# EAGLE board 13901-SparkFun_Differential_I2C_Breakout_PCA9615_Qwiic-panel.v10 (EAGLE 7.5.0), part 1 of 3
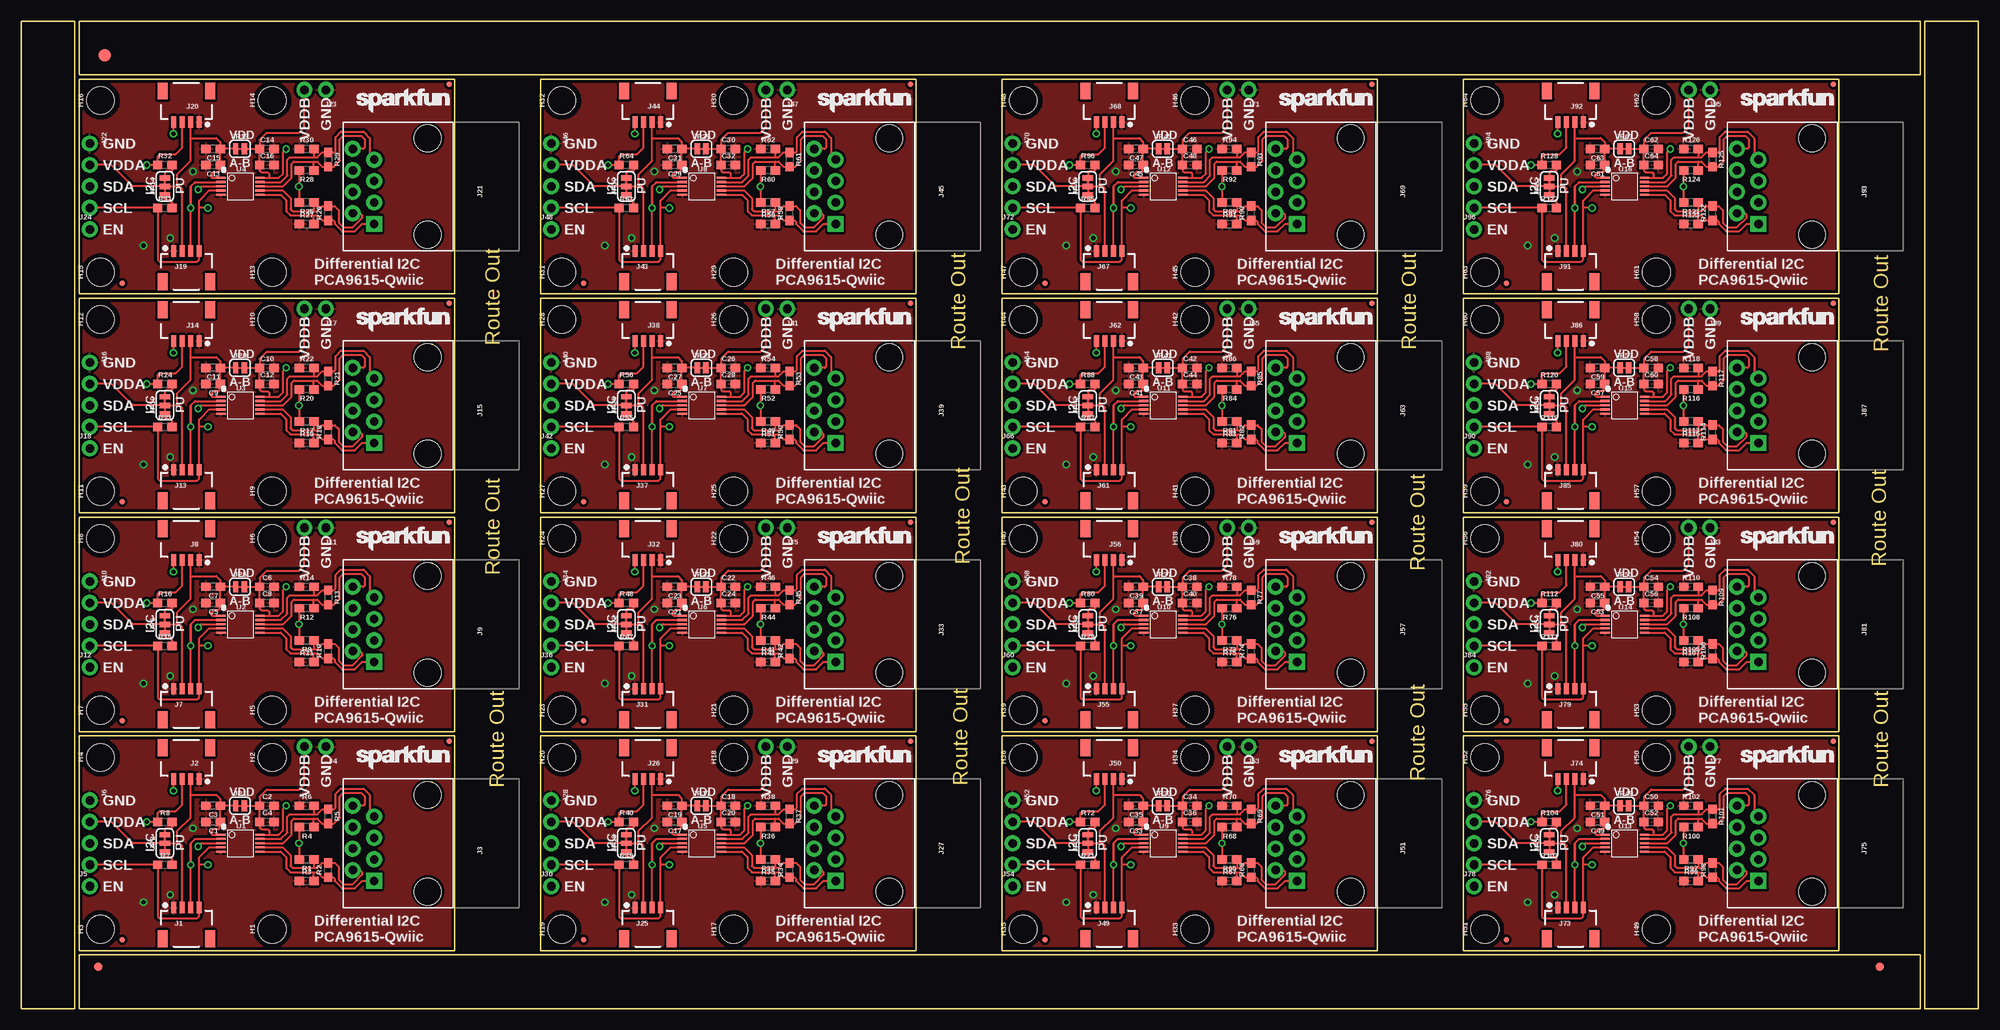
[diagram p0: board, top side]
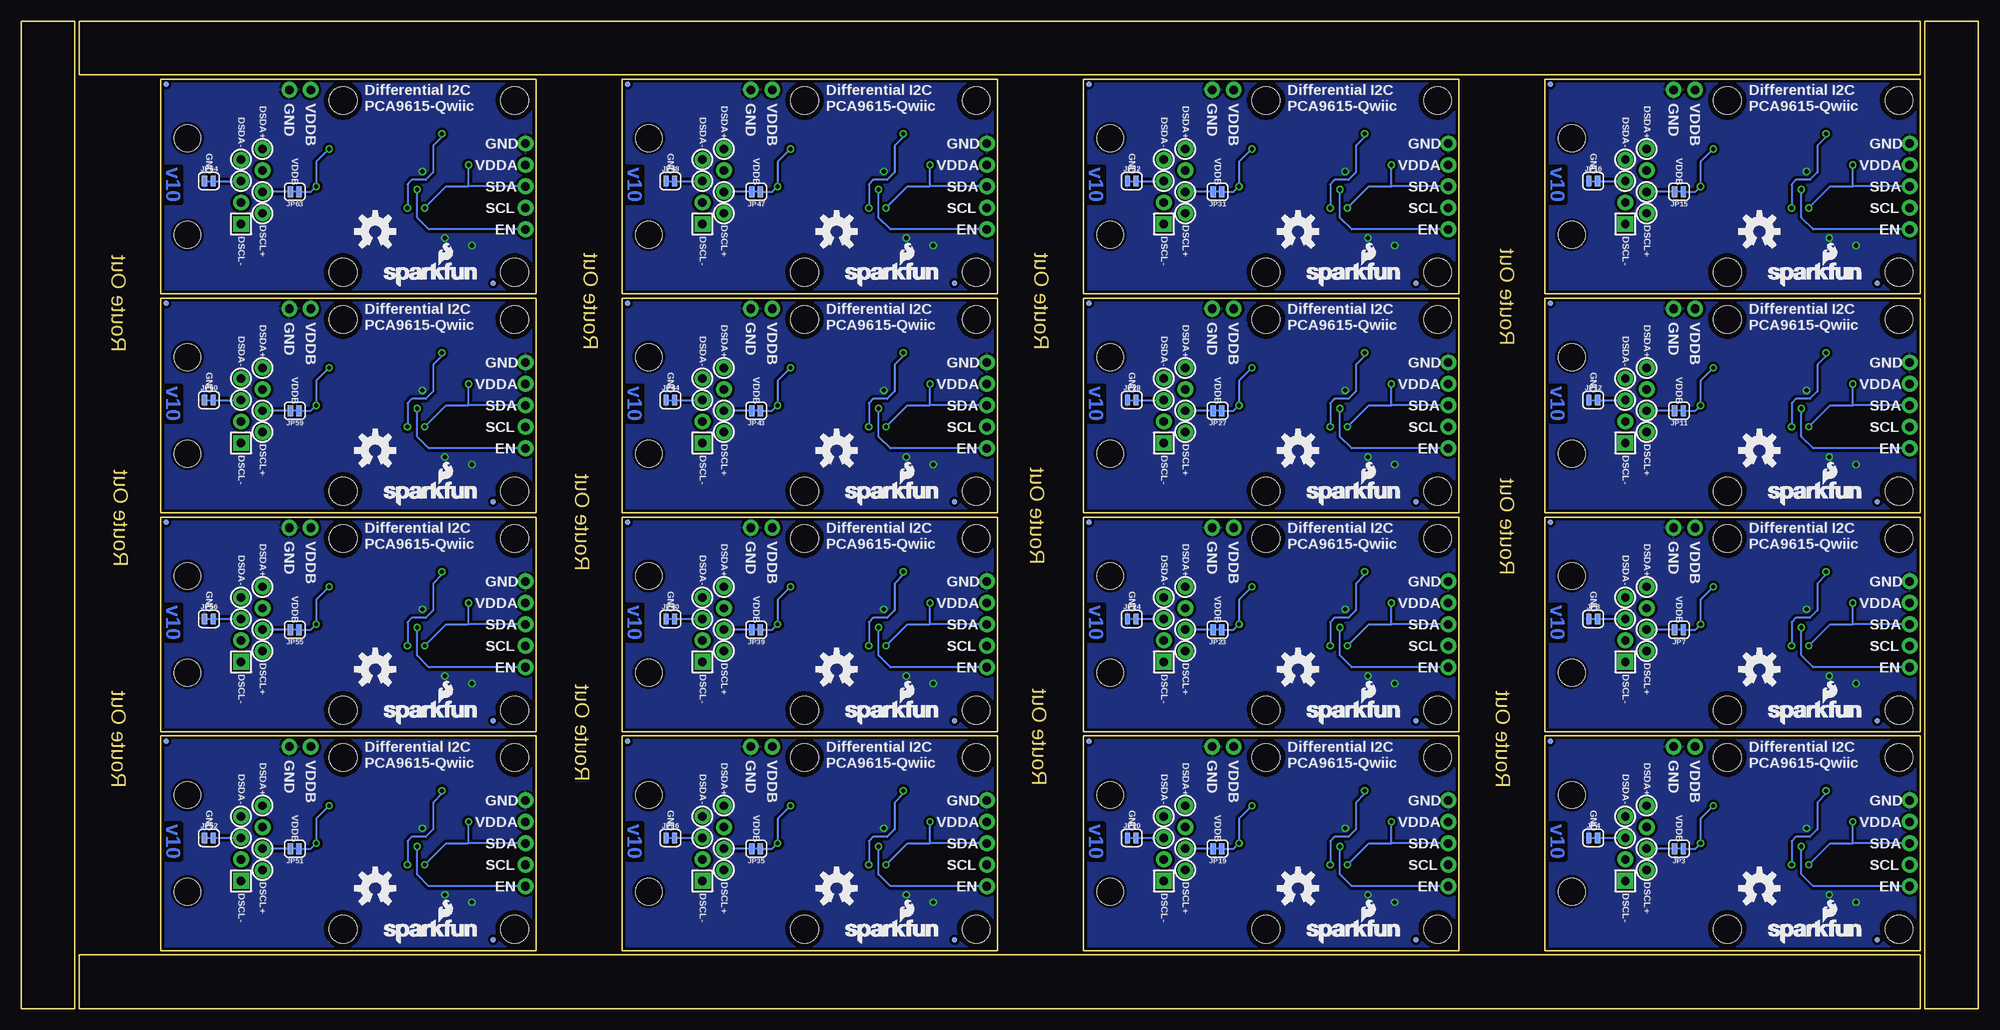
[diagram p1: board, bottom side, seen from below]

Size 231.65 x 116.84 mm. Coordinates in mm from the lower left corner, seen from the top.
Outline: 79.25,0 6.86,0 6.86,6.35 29.72,6.35
Outline: 27.18,6.35 224.79,6.35 224.79,0 76.71,0
Outline: 6.35,72.39 6.35,0 0,0 0,22.86
Outline: 0,20.32 0,116.84 6.35,116.84 6.35,69.85
Outline: 152.65,116.84 224.79,116.84 224.79,110.49 202.18,110.49
Outline: 204.72,110.49 6.86,110.49 6.86,116.84 155.19,116.84
Outline: 225.3,44.45 225.3,116.84 231.65,116.84 231.65,93.98
Outline: 231.65,96.52 231.65,0 225.3,0 225.3,46.99
Outline: 51.31,6.86 6.86,6.86 6.86,32.26 51.31,32.26 51.31,6.86
Outline: 51.31,32.77 6.86,32.77 6.86,58.17 51.31,58.17 51.31,32.77
Outline: 51.31,58.67 6.86,58.67 6.86,84.07 51.31,84.07 51.31,58.67
Outline: 51.31,84.58 6.86,84.58 6.86,109.98 51.31,109.98 51.31,84.58
Outline: 105.92,6.86 61.47,6.86 61.47,32.26 105.92,32.26 105.92,6.86
Outline: 105.92,32.77 61.47,32.77 61.47,58.17 105.92,58.17 105.92,32.77
Outline: 105.92,58.67 61.47,58.67 61.47,84.07 105.92,84.07 105.92,58.67
Outline: 105.92,84.58 61.47,84.58 61.47,109.98 105.92,109.98 105.92,84.58
Outline: 160.53,6.86 116.08,6.86 116.08,32.26 160.53,32.26 160.53,6.86
Outline: 160.53,32.77 116.08,32.77 116.08,58.17 160.53,58.17 160.53,32.77
Outline: 160.53,58.67 116.08,58.67 116.08,84.07 160.53,84.07 160.53,58.67
Outline: 160.53,84.58 116.08,84.58 116.08,109.98 160.53,109.98 160.53,84.58
Outline: 215.14,6.86 170.69,6.86 170.69,32.26 215.14,32.26 215.14,6.86
Outline: 215.14,32.77 170.69,32.77 170.69,58.17 215.14,58.17 215.14,32.77
Outline: 215.14,58.67 170.69,58.67 170.69,84.07 215.14,84.07 215.14,58.67
Outline: 215.14,84.58 170.69,84.58 170.69,109.98 215.14,109.98 215.14,84.58
Copper layers (1*16): Top 0.035mm / dielectric 1.5mm / Bottom 0.035mm
Design rules "SparkFun-2-layer-TIGHT": minimum track width 7mil, minimum drill 15mil, track to track 7mil, track to pad 7mil, pad to pad 7mil, via to via 7mil, smd to smd 7mil, copper to edge 7mil, drill to drill 7mil, minimum pad ring 7mil, minimum via ring 7mil, stop-mask expansion 4mil, vias tented up to drill 25mil, thermal gap 10mil
Net classes: 0 default: width 0.203 mm; 1 power: width 0.381 mm, clearance 0.254 mm

## Footprints (pad centres in the part's own frame; a part is rotated, then mirrored left to right if it is on the bottom)
0603 = smd 1.1 x 1: 1 -0.85,0; 2 0.85,0
FIDUCIAL-1X2 = smd 1 x 1: 1 0,0
FIDUCIAL-1.5X3 = smd 1.5 x 1.5: 1 0,0
FIDUCIAL-MICRO = smd 0.635 x 0.635: 1 0,0
STAND-OFF = hole 3.302: 0,0
1X04_1MM_RA = smd 0.6 x 1.35: 1 -1.5,0; 2 -0.5,0; 3 0.5,0; 4 1.5,0 | smd 1.2 x 2: NC1 2.8,-3.675; NC2 -2.8,-3.675
RJ45-8 = drill 1 pad 1.88 square: 1 -4.445,6.35 | drill 1 pad 1.88: 2 -3.175,8.89; 3 -1.905,6.35; 4 -0.635,8.89; 5 0.635,6.35; 6 1.905,8.89; 7 3.175,6.35; 8 4.445,8.89 | hole 3.2: -5.715,0; 5.715,0
1X02_NO_SILK = drill 1.016 pad 1.88: 1 0,0; 2 2.54,0
1X01_NO_SILK = drill 1.016 pad 1.88: 1 0,0
1X04_NO_SILK = drill 1.016 pad 1.88: 1 0,0; 2 2.54,0; 3 5.08,0; 4 7.62,0
SMT-JUMPER_2_NC_TRACE_SILK = smd 0.635 x 1.27: 1 -0.508,0; 2 0.508,0
SMT-JUMPER_3_2-NC_TRACE_SILK = smd 0.635 x 1.27: 1 -1.016,0; 2 0,0; 3 1.016,0
TSSOP10 = smd 1.1 x 0.25: 1 -2.259,1.018; 2 -2.259,0.517; 3 -2.259,0.018; 4 -2.259,-0.482; 5 -2.259,-0.988; 6 2.366,-0.988; 7 2.366,-0.482; 8 2.366,0.018; 9 2.366,0.517; 10 2.366,1.018

## Placement (x,y rotation side)
C1  0.1uF  [0603]  22.73,22.1 180 top
C2  0.1uF  [0603]  29.08,24 0 top
C3  1.0uF  [0603]  22.73,24 180 top
C4  1.0uF  [0603]  29.08,22.1 0 top
C5  0.1uF  [0603]  22.73,48.01 180 top
C6  0.1uF  [0603]  29.08,49.91 0 top
C7  1.0uF  [0603]  22.73,49.91 180 top
C8  1.0uF  [0603]  29.08,48.01 0 top
C9  0.1uF  [0603]  22.73,73.91 180 top
C10  0.1uF  [0603]  29.08,75.82 0 top
C11  1.0uF  [0603]  22.73,75.82 180 top
C12  1.0uF  [0603]  29.08,73.91 0 top
C13  0.1uF  [0603]  22.73,99.82 180 top
C14  0.1uF  [0603]  29.08,101.73 0 top
C15  1.0uF  [0603]  22.73,101.73 180 top
C16  1.0uF  [0603]  29.08,99.82 0 top
C17  0.1uF  [0603]  77.34,22.1 180 top
C18  0.1uF  [0603]  83.69,24 0 top
C19  1.0uF  [0603]  77.34,24 180 top
C20  1.0uF  [0603]  83.69,22.1 0 top
C21  0.1uF  [0603]  77.34,48.01 180 top
C22  0.1uF  [0603]  83.69,49.91 0 top
C23  1.0uF  [0603]  77.34,49.91 180 top
C24  1.0uF  [0603]  83.69,48.01 0 top
C25  0.1uF  [0603]  77.34,73.91 180 top
C26  0.1uF  [0603]  83.69,75.82 0 top
C27  1.0uF  [0603]  77.34,75.82 180 top
C28  1.0uF  [0603]  83.69,73.91 0 top
C29  0.1uF  [0603]  77.34,99.82 180 top
C30  0.1uF  [0603]  83.69,101.73 0 top
C31  1.0uF  [0603]  77.34,101.73 180 top
C32  1.0uF  [0603]  83.69,99.82 0 top
C33  0.1uF  [0603]  131.95,22.1 180 top
C34  0.1uF  [0603]  138.3,24 0 top
C35  1.0uF  [0603]  131.95,24 180 top
C36  1.0uF  [0603]  138.3,22.1 0 top
C37  0.1uF  [0603]  131.95,48.01 180 top
C38  0.1uF  [0603]  138.3,49.91 0 top
C39  1.0uF  [0603]  131.95,49.91 180 top
C40  1.0uF  [0603]  138.3,48.01 0 top
C41  0.1uF  [0603]  131.95,73.91 180 top
C42  0.1uF  [0603]  138.3,75.82 0 top
C43  1.0uF  [0603]  131.95,75.82 180 top
C44  1.0uF  [0603]  138.3,73.91 0 top
C45  0.1uF  [0603]  131.95,99.82 180 top
C46  0.1uF  [0603]  138.3,101.73 0 top
C47  1.0uF  [0603]  131.95,101.73 180 top
C48  1.0uF  [0603]  138.3,99.82 0 top
C49  0.1uF  [0603]  186.56,22.1 180 top
C50  0.1uF  [0603]  192.91,24 0 top
C51  1.0uF  [0603]  186.56,24 180 top
C52  1.0uF  [0603]  192.91,22.1 0 top
C53  0.1uF  [0603]  186.56,48.01 180 top
C54  0.1uF  [0603]  192.91,49.91 0 top
C55  1.0uF  [0603]  186.56,49.91 180 top
C56  1.0uF  [0603]  192.91,48.01 0 top
C57  0.1uF  [0603]  186.56,73.91 180 top
C58  0.1uF  [0603]  192.91,75.82 0 top
C59  1.0uF  [0603]  186.56,75.82 180 top
C60  1.0uF  [0603]  192.91,73.91 0 top
C61  0.1uF  [0603]  186.56,99.82 180 top
C62  0.1uF  [0603]  192.91,101.73 0 top
C63  1.0uF  [0603]  186.56,101.73 180 top
C64  1.0uF  [0603]  192.91,99.82 0 top
E$1  [FIDUCIAL-1X2]  9.14,4.95 270 top
E$2  [FIDUCIAL-1X2]  219.96,4.95 90 top
E$3  [FIDUCIAL-1.5X3]  9.91,112.78 0 top
FD1  FIDUCIALUFIDUCIAL  [FIDUCIAL-MICRO]  11.94,8.13 0 top
FD2  FIDUCIALUFIDUCIAL  [FIDUCIAL-MICRO]  50.67,31.62 0 top
FD3  FIDUCIALUFIDUCIAL  [FIDUCIAL-MICRO]  11.94,8.13 0 bottom
FD4  FIDUCIALUFIDUCIAL  [FIDUCIAL-MICRO]  50.67,31.62 0 bottom
FD5  FIDUCIALUFIDUCIAL  [FIDUCIAL-MICRO]  11.94,34.04 0 top
FD6  FIDUCIALUFIDUCIAL  [FIDUCIAL-MICRO]  50.67,57.53 0 top
FD7  FIDUCIALUFIDUCIAL  [FIDUCIAL-MICRO]  11.94,34.04 0 bottom
FD8  FIDUCIALUFIDUCIAL  [FIDUCIAL-MICRO]  50.67,57.53 0 bottom
FD9  FIDUCIALUFIDUCIAL  [FIDUCIAL-MICRO]  11.94,59.94 0 top
FD10  FIDUCIALUFIDUCIAL  [FIDUCIAL-MICRO]  50.67,83.44 0 top
FD11  FIDUCIALUFIDUCIAL  [FIDUCIAL-MICRO]  11.94,59.94 0 bottom
FD12  FIDUCIALUFIDUCIAL  [FIDUCIAL-MICRO]  50.67,83.44 0 bottom
FD13  FIDUCIALUFIDUCIAL  [FIDUCIAL-MICRO]  11.94,85.85 0 top
FD14  FIDUCIALUFIDUCIAL  [FIDUCIAL-MICRO]  50.67,109.35 0 top
FD15  FIDUCIALUFIDUCIAL  [FIDUCIAL-MICRO]  11.94,85.85 0 bottom
FD16  FIDUCIALUFIDUCIAL  [FIDUCIAL-MICRO]  50.67,109.35 0 bottom
FD17  FIDUCIALUFIDUCIAL  [FIDUCIAL-MICRO]  66.55,8.13 0 top
FD18  FIDUCIALUFIDUCIAL  [FIDUCIAL-MICRO]  105.28,31.62 0 top
FD19  FIDUCIALUFIDUCIAL  [FIDUCIAL-MICRO]  66.55,8.13 0 bottom
FD20  FIDUCIALUFIDUCIAL  [FIDUCIAL-MICRO]  105.28,31.62 0 bottom
FD21  FIDUCIALUFIDUCIAL  [FIDUCIAL-MICRO]  66.55,34.04 0 top
FD22  FIDUCIALUFIDUCIAL  [FIDUCIAL-MICRO]  105.28,57.53 0 top
FD23  FIDUCIALUFIDUCIAL  [FIDUCIAL-MICRO]  66.55,34.04 0 bottom
FD24  FIDUCIALUFIDUCIAL  [FIDUCIAL-MICRO]  105.28,57.53 0 bottom
FD25  FIDUCIALUFIDUCIAL  [FIDUCIAL-MICRO]  66.55,59.94 0 top
FD26  FIDUCIALUFIDUCIAL  [FIDUCIAL-MICRO]  105.28,83.44 0 top
FD27  FIDUCIALUFIDUCIAL  [FIDUCIAL-MICRO]  66.55,59.94 0 bottom
FD28  FIDUCIALUFIDUCIAL  [FIDUCIAL-MICRO]  105.28,83.44 0 bottom
FD29  FIDUCIALUFIDUCIAL  [FIDUCIAL-MICRO]  66.55,85.85 0 top
FD30  FIDUCIALUFIDUCIAL  [FIDUCIAL-MICRO]  105.28,109.35 0 top
FD31  FIDUCIALUFIDUCIAL  [FIDUCIAL-MICRO]  66.55,85.85 0 bottom
FD32  FIDUCIALUFIDUCIAL  [FIDUCIAL-MICRO]  105.28,109.35 0 bottom
FD33  FIDUCIALUFIDUCIAL  [FIDUCIAL-MICRO]  121.16,8.13 0 top
FD34  FIDUCIALUFIDUCIAL  [FIDUCIAL-MICRO]  159.89,31.62 0 top
FD35  FIDUCIALUFIDUCIAL  [FIDUCIAL-MICRO]  121.16,8.13 0 bottom
FD36  FIDUCIALUFIDUCIAL  [FIDUCIAL-MICRO]  159.89,31.62 0 bottom
FD37  FIDUCIALUFIDUCIAL  [FIDUCIAL-MICRO]  121.16,34.04 0 top
FD38  FIDUCIALUFIDUCIAL  [FIDUCIAL-MICRO]  159.89,57.53 0 top
FD39  FIDUCIALUFIDUCIAL  [FIDUCIAL-MICRO]  121.16,34.04 0 bottom
FD40  FIDUCIALUFIDUCIAL  [FIDUCIAL-MICRO]  159.89,57.53 0 bottom
FD41  FIDUCIALUFIDUCIAL  [FIDUCIAL-MICRO]  121.16,59.94 0 top
FD42  FIDUCIALUFIDUCIAL  [FIDUCIAL-MICRO]  159.89,83.44 0 top
FD43  FIDUCIALUFIDUCIAL  [FIDUCIAL-MICRO]  121.16,59.94 0 bottom
FD44  FIDUCIALUFIDUCIAL  [FIDUCIAL-MICRO]  159.89,83.44 0 bottom
FD45  FIDUCIALUFIDUCIAL  [FIDUCIAL-MICRO]  121.16,85.85 0 top
FD46  FIDUCIALUFIDUCIAL  [FIDUCIAL-MICRO]  159.89,109.35 0 top
FD47  FIDUCIALUFIDUCIAL  [FIDUCIAL-MICRO]  121.16,85.85 0 bottom
FD48  FIDUCIALUFIDUCIAL  [FIDUCIAL-MICRO]  159.89,109.35 0 bottom
FD49  FIDUCIALUFIDUCIAL  [FIDUCIAL-MICRO]  175.77,8.13 0 top
FD50  FIDUCIALUFIDUCIAL  [FIDUCIAL-MICRO]  214.5,31.62 0 top
FD51  FIDUCIALUFIDUCIAL  [FIDUCIAL-MICRO]  175.77,8.13 0 bottom
FD52  FIDUCIALUFIDUCIAL  [FIDUCIAL-MICRO]  214.5,31.62 0 bottom
FD53  FIDUCIALUFIDUCIAL  [FIDUCIAL-MICRO]  175.77,34.04 0 top
FD54  FIDUCIALUFIDUCIAL  [FIDUCIAL-MICRO]  214.5,57.53 0 top
FD55  FIDUCIALUFIDUCIAL  [FIDUCIAL-MICRO]  175.77,34.04 0 bottom
FD56  FIDUCIALUFIDUCIAL  [FIDUCIAL-MICRO]  214.5,57.53 0 bottom
FD57  FIDUCIALUFIDUCIAL  [FIDUCIAL-MICRO]  175.77,59.94 0 top
FD58  FIDUCIALUFIDUCIAL  [FIDUCIAL-MICRO]  214.5,83.44 0 top
FD59  FIDUCIALUFIDUCIAL  [FIDUCIAL-MICRO]  175.77,59.94 0 bottom
FD60  FIDUCIALUFIDUCIAL  [FIDUCIAL-MICRO]  214.5,83.44 0 bottom
FD61  FIDUCIALUFIDUCIAL  [FIDUCIAL-MICRO]  175.77,85.85 0 top
FD62  FIDUCIALUFIDUCIAL  [FIDUCIAL-MICRO]  214.5,109.35 0 top
FD63  FIDUCIALUFIDUCIAL  [FIDUCIAL-MICRO]  175.77,85.85 0 bottom
FD64  FIDUCIALUFIDUCIAL  [FIDUCIAL-MICRO]  214.5,109.35 0 bottom
H1  STAND-OFF  [STAND-OFF]  29.72,9.4 90 top
H2  STAND-OFF  [STAND-OFF]  29.72,29.72 90 top
H3  STAND-OFF  [STAND-OFF]  9.4,9.4 90 top
H4  STAND-OFF  [STAND-OFF]  9.4,29.72 90 top
H5  STAND-OFF  [STAND-OFF]  29.72,35.31 90 top
H6  STAND-OFF  [STAND-OFF]  29.72,55.63 90 top
H7  STAND-OFF  [STAND-OFF]  9.4,35.31 90 top
H8  STAND-OFF  [STAND-OFF]  9.4,55.63 90 top
H9  STAND-OFF  [STAND-OFF]  29.72,61.21 90 top
H10  STAND-OFF  [STAND-OFF]  29.72,81.53 90 top
H11  STAND-OFF  [STAND-OFF]  9.4,61.21 90 top
H12  STAND-OFF  [STAND-OFF]  9.4,81.53 90 top
H13  STAND-OFF  [STAND-OFF]  29.72,87.12 90 top
H14  STAND-OFF  [STAND-OFF]  29.72,107.44 90 top
H15  STAND-OFF  [STAND-OFF]  9.4,87.12 90 top
H16  STAND-OFF  [STAND-OFF]  9.4,107.44 90 top
H17  STAND-OFF  [STAND-OFF]  84.33,9.4 90 top
H18  STAND-OFF  [STAND-OFF]  84.33,29.72 90 top
H19  STAND-OFF  [STAND-OFF]  64.01,9.4 90 top
H20  STAND-OFF  [STAND-OFF]  64.01,29.72 90 top
H21  STAND-OFF  [STAND-OFF]  84.33,35.31 90 top
H22  STAND-OFF  [STAND-OFF]  84.33,55.63 90 top
H23  STAND-OFF  [STAND-OFF]  64.01,35.31 90 top
H24  STAND-OFF  [STAND-OFF]  64.01,55.63 90 top
H25  STAND-OFF  [STAND-OFF]  84.33,61.21 90 top
H26  STAND-OFF  [STAND-OFF]  84.33,81.53 90 top
H27  STAND-OFF  [STAND-OFF]  64.01,61.21 90 top
H28  STAND-OFF  [STAND-OFF]  64.01,81.53 90 top
H29  STAND-OFF  [STAND-OFF]  84.33,87.12 90 top
H30  STAND-OFF  [STAND-OFF]  84.33,107.44 90 top
H31  STAND-OFF  [STAND-OFF]  64.01,87.12 90 top
H32  STAND-OFF  [STAND-OFF]  64.01,107.44 90 top
H33  STAND-OFF  [STAND-OFF]  138.94,9.4 90 top
H34  STAND-OFF  [STAND-OFF]  138.94,29.72 90 top
H35  STAND-OFF  [STAND-OFF]  118.62,9.4 90 top
H36  STAND-OFF  [STAND-OFF]  118.62,29.72 90 top
H37  STAND-OFF  [STAND-OFF]  138.94,35.31 90 top
H38  STAND-OFF  [STAND-OFF]  138.94,55.63 90 top
H39  STAND-OFF  [STAND-OFF]  118.62,35.31 90 top
H40  STAND-OFF  [STAND-OFF]  118.62,55.63 90 top
H41  STAND-OFF  [STAND-OFF]  138.94,61.21 90 top
H42  STAND-OFF  [STAND-OFF]  138.94,81.53 90 top
H43  STAND-OFF  [STAND-OFF]  118.62,61.21 90 top
H44  STAND-OFF  [STAND-OFF]  118.62,81.53 90 top
H45  STAND-OFF  [STAND-OFF]  138.94,87.12 90 top
H46  STAND-OFF  [STAND-OFF]  138.94,107.44 90 top
H47  STAND-OFF  [STAND-OFF]  118.62,87.12 90 top
H48  STAND-OFF  [STAND-OFF]  118.62,107.44 90 top
H49  STAND-OFF  [STAND-OFF]  193.55,9.4 90 top
H50  STAND-OFF  [STAND-OFF]  193.55,29.72 90 top
H51  STAND-OFF  [STAND-OFF]  173.23,9.4 90 top
H52  STAND-OFF  [STAND-OFF]  173.23,29.72 90 top
H53  STAND-OFF  [STAND-OFF]  193.55,35.31 90 top
H54  STAND-OFF  [STAND-OFF]  193.55,55.63 90 top
H55  STAND-OFF  [STAND-OFF]  173.23,35.31 90 top
H56  STAND-OFF  [STAND-OFF]  173.23,55.63 90 top
H57  STAND-OFF  [STAND-OFF]  193.55,61.21 90 top
H58  STAND-OFF  [STAND-OFF]  193.55,81.53 90 top
H59  STAND-OFF  [STAND-OFF]  173.23,61.21 90 top
H60  STAND-OFF  [STAND-OFF]  173.23,81.53 90 top
H61  STAND-OFF  [STAND-OFF]  193.55,87.12 90 top
H62  STAND-OFF  [STAND-OFF]  193.55,107.44 90 top
H63  STAND-OFF  [STAND-OFF]  173.23,87.12 90 top
H64  STAND-OFF  [STAND-OFF]  173.23,107.44 90 top
J1  [1X04_1MM_RA]  19.56,11.94 0 top
J2  [1X04_1MM_RA]  19.56,27.18 180 top
J3  RJ45  [RJ45-8]  48.13,19.56 90 top
J4  [1X02_NO_SILK]  36.07,30.99 180 top
J5  [1X01_NO_SILK]  8.13,14.48 0 top
J6  [1X04_NO_SILK]  8.13,24.64 270 top
J7  [1X04_1MM_RA]  19.56,37.85 0 top
J8  [1X04_1MM_RA]  19.56,53.09 180 top
J9  RJ45  [RJ45-8]  48.13,45.47 90 top
J10  [1X04_NO_SILK]  8.13,50.55 270 top
J11  [1X02_NO_SILK]  36.07,56.9 180 top
J12  [1X01_NO_SILK]  8.13,40.39 0 top
J13  [1X04_1MM_RA]  19.56,63.75 0 top
J14  [1X04_1MM_RA]  19.56,78.99 180 top
J15  RJ45  [RJ45-8]  48.13,71.37 90 top
J16  [1X04_NO_SILK]  8.13,76.45 270 top
J17  [1X02_NO_SILK]  36.07,82.8 180 top
J18  [1X01_NO_SILK]  8.13,66.29 0 top
J19  [1X04_1MM_RA]  19.56,89.66 0 top
J20  [1X04_1MM_RA]  19.56,104.9 180 top
J21  RJ45  [RJ45-8]  48.13,97.28 90 top
J22  [1X04_NO_SILK]  8.13,102.36 270 top
J23  [1X02_NO_SILK]  36.07,108.71 180 top
J24  [1X01_NO_SILK]  8.13,92.2 0 top
J25  [1X04_1MM_RA]  74.17,11.94 0 top
J26  [1X04_1MM_RA]  74.17,27.18 180 top
J27  RJ45  [RJ45-8]  102.74,19.56 90 top
J28  [1X04_NO_SILK]  62.74,24.64 270 top
J29  [1X02_NO_SILK]  90.68,30.99 180 top
J30  [1X01_NO_SILK]  62.74,14.48 0 top
J31  [1X04_1MM_RA]  74.17,37.85 0 top
J32  [1X04_1MM_RA]  74.17,53.09 180 top
J33  RJ45  [RJ45-8]  102.74,45.47 90 top
J34  [1X04_NO_SILK]  62.74,50.55 270 top
J35  [1X02_NO_SILK]  90.68,56.9 180 top
J36  [1X01_NO_SILK]  62.74,40.39 0 top
J37  [1X04_1MM_RA]  74.17,63.75 0 top
J38  [1X04_1MM_RA]  74.17,78.99 180 top
J39  RJ45  [RJ45-8]  102.74,71.37 90 top
J40  [1X04_NO_SILK]  62.74,76.45 270 top
J41  [1X02_NO_SILK]  90.68,82.8 180 top
J42  [1X01_NO_SILK]  62.74,66.29 0 top
J43  [1X04_1MM_RA]  74.17,89.66 0 top
J44  [1X04_1MM_RA]  74.17,104.9 180 top
J45  RJ45  [RJ45-8]  102.74,97.28 90 top
J46  [1X04_NO_SILK]  62.74,102.36 270 top
J47  [1X02_NO_SILK]  90.68,108.71 180 top
J48  [1X01_NO_SILK]  62.74,92.2 0 top
J49  [1X04_1MM_RA]  128.78,11.94 0 top
J50  [1X04_1MM_RA]  128.78,27.18 180 top
J51  RJ45  [RJ45-8]  157.35,19.56 90 top
J52  [1X04_NO_SILK]  117.35,24.64 270 top
J53  [1X02_NO_SILK]  145.29,30.99 180 top
J54  [1X01_NO_SILK]  117.35,14.48 0 top
J55  [1X04_1MM_RA]  128.78,37.85 0 top
J56  [1X04_1MM_RA]  128.78,53.09 180 top
J57  RJ45  [RJ45-8]  157.35,45.47 90 top
J58  [1X04_NO_SILK]  117.35,50.55 270 top
J59  [1X02_NO_SILK]  145.29,56.9 180 top
J60  [1X01_NO_SILK]  117.35,40.39 0 top
J61  [1X04_1MM_RA]  128.78,63.75 0 top
J62  [1X04_1MM_RA]  128.78,78.99 180 top
J63  RJ45  [RJ45-8]  157.35,71.37 90 top
J64  [1X04_NO_SILK]  117.35,76.45 270 top
J65  [1X02_NO_SILK]  145.29,82.8 180 top
J66  [1X01_NO_SILK]  117.35,66.29 0 top
J67  [1X04_1MM_RA]  128.78,89.66 0 top
J68  [1X04_1MM_RA]  128.78,104.9 180 top
J69  RJ45  [RJ45-8]  157.35,97.28 90 top
J70  [1X04_NO_SILK]  117.35,102.36 270 top
J71  [1X02_NO_SILK]  145.29,108.71 180 top
J72  [1X01_NO_SILK]  117.35,92.2 0 top
J73  [1X04_1MM_RA]  183.39,11.94 0 top
J74  [1X04_1MM_RA]  183.39,27.18 180 top
J75  RJ45  [RJ45-8]  211.96,19.56 90 top
J76  [1X04_NO_SILK]  171.96,24.64 270 top
J77  [1X02_NO_SILK]  199.9,30.99 180 top
J78  [1X01_NO_SILK]  171.96,14.48 0 top
J79  [1X04_1MM_RA]  183.39,37.85 0 top
J80  [1X04_1MM_RA]  183.39,53.09 180 top
J81  RJ45  [RJ45-8]  211.96,45.47 90 top
J82  [1X04_NO_SILK]  171.96,50.55 270 top
J83  [1X02_NO_SILK]  199.9,56.9 180 top
J84  [1X01_NO_SILK]  171.96,40.39 0 top
J85  [1X04_1MM_RA]  183.39,63.75 0 top
J86  [1X04_1MM_RA]  183.39,78.99 180 top
J87  RJ45  [RJ45-8]  211.96,71.37 90 top
J88  [1X04_NO_SILK]  171.96,76.45 270 top
J89  [1X02_NO_SILK]  199.9,82.8 180 top
J90  [1X01_NO_SILK]  171.96,66.29 0 top
J91  [1X04_1MM_RA]  183.39,89.66 0 top
J92  [1X04_1MM_RA]  183.39,104.9 180 top
J93  RJ45  [RJ45-8]  211.96,97.28 90 top
J94  [1X04_NO_SILK]  171.96,102.36 270 top
J95  [1X02_NO_SILK]  199.9,108.71 180 top
J96  [1X01_NO_SILK]  171.96,92.2 0 top
JP1  JUMPER  [SMT-JUMPER_2_NC_TRACE_SILK]  25.91,24 0 top
JP2  [SMT-JUMPER_3_2-NC_TRACE_SILK]  17.02,19.56 90 top
JP3  [SMT-JUMPER_2_NC_TRACE_SILK]  35.43,18.92 180 bottom
JP4  [SMT-JUMPER_2_NC_TRACE_SILK]  45.59,20.19 0 bottom
JP5  JUMPER  [SMT-JUMPER_2_NC_TRACE_SILK]  25.91,49.91 0 top
JP6  [SMT-JUMPER_3_2-NC_TRACE_SILK]  17.02,45.47 90 top
JP7  [SMT-JUMPER_2_NC_TRACE_SILK]  35.43,44.83 180 bottom
JP8  [SMT-JUMPER_2_NC_TRACE_SILK]  45.59,46.1 0 bottom
JP9  JUMPER  [SMT-JUMPER_2_NC_TRACE_SILK]  25.91,75.82 0 top
JP10  [SMT-JUMPER_3_2-NC_TRACE_SILK]  17.02,71.37 90 top
JP11  [SMT-JUMPER_2_NC_TRACE_SILK]  35.43,70.74 180 bottom
JP12  [SMT-JUMPER_2_NC_TRACE_SILK]  45.59,72.01 0 bottom
JP13  JUMPER  [SMT-JUMPER_2_NC_TRACE_SILK]  25.91,101.73 0 top
JP14  [SMT-JUMPER_3_2-NC_TRACE_SILK]  17.02,97.28 90 top
JP15  [SMT-JUMPER_2_NC_TRACE_SILK]  35.43,96.65 180 bottom
JP16  [SMT-JUMPER_2_NC_TRACE_SILK]  45.59,97.92 0 bottom
JP17  JUMPER  [SMT-JUMPER_2_NC_TRACE_SILK]  80.52,24 0 top
JP18  [SMT-JUMPER_3_2-NC_TRACE_SILK]  71.63,19.56 90 top
JP19  [SMT-JUMPER_2_NC_TRACE_SILK]  90.04,18.92 180 bottom
JP20  [SMT-JUMPER_2_NC_TRACE_SILK]  100.2,20.19 0 bottom
JP21  JUMPER  [SMT-JUMPER_2_NC_TRACE_SILK]  80.52,49.91 0 top
JP22  [SMT-JUMPER_3_2-NC_TRACE_SILK]  71.63,45.47 90 top
JP23  [SMT-JUMPER_2_NC_TRACE_SILK]  90.04,44.83 180 bottom
JP24  [SMT-JUMPER_2_NC_TRACE_SILK]  100.2,46.1 0 bottom
JP25  JUMPER  [SMT-JUMPER_2_NC_TRACE_SILK]  80.52,75.82 0 top
JP26  [SMT-JUMPER_3_2-NC_TRACE_SILK]  71.63,71.37 90 top
JP27  [SMT-JUMPER_2_NC_TRACE_SILK]  90.04,70.74 180 bottom
JP28  [SMT-JUMPER_2_NC_TRACE_SILK]  100.2,72.01 0 bottom
JP29  JUMPER  [SMT-JUMPER_2_NC_TRACE_SILK]  80.52,101.73 0 top
JP30  [SMT-JUMPER_3_2-NC_TRACE_SILK]  71.63,97.28 90 top
JP31  [SMT-JUMPER_2_NC_TRACE_SILK]  90.04,96.65 180 bottom
JP32  [SMT-JUMPER_2_NC_TRACE_SILK]  100.2,97.92 0 bottom
JP33  JUMPER  [SMT-JUMPER_2_NC_TRACE_SILK]  135.13,24 0 top
JP34  [SMT-JUMPER_3_2-NC_TRACE_SILK]  126.24,19.56 90 top
JP35  [SMT-JUMPER_2_NC_TRACE_SILK]  144.65,18.92 180 bottom
JP36  [SMT-JUMPER_2_NC_TRACE_SILK]  154.81,20.19 0 bottom
JP37  JUMPER  [SMT-JUMPER_2_NC_TRACE_SILK]  135.13,49.91 0 top
JP38  [SMT-JUMPER_3_2-NC_TRACE_SILK]  126.24,45.47 90 top
JP39  [SMT-JUMPER_2_NC_TRACE_SILK]  144.65,44.83 180 bottom
JP40  [SMT-JUMPER_2_NC_TRACE_SILK]  154.81,46.1 0 bottom
JP41  JUMPER  [SMT-JUMPER_2_NC_TRACE_SILK]  135.13,75.82 0 top
JP42  [SMT-JUMPER_3_2-NC_TRACE_SILK]  126.24,71.37 90 top
JP43  [SMT-JUMPER_2_NC_TRACE_SILK]  144.65,70.74 180 bottom
JP44  [SMT-JUMPER_2_NC_TRACE_SILK]  154.81,72.01 0 bottom
JP45  JUMPER  [SMT-JUMPER_2_NC_TRACE_SILK]  135.13,101.73 0 top
JP46  [SMT-JUMPER_3_2-NC_TRACE_SILK]  126.24,97.28 90 top
JP47  [SMT-JUMPER_2_NC_TRACE_SILK]  144.65,96.65 180 bottom
JP48  [SMT-JUMPER_2_NC_TRACE_SILK]  154.81,97.92 0 bottom
JP49  JUMPER  [SMT-JUMPER_2_NC_TRACE_SILK]  189.74,24 0 top
JP50  [SMT-JUMPER_3_2-NC_TRACE_SILK]  180.85,19.56 90 top
JP51  [SMT-JUMPER_2_NC_TRACE_SILK]  199.26,18.92 180 bottom
JP52  [SMT-JUMPER_2_NC_TRACE_SILK]  209.42,20.19 0 bottom
JP53  JUMPER  [SMT-JUMPER_2_NC_TRACE_SILK]  189.74,49.91 0 top
JP54  [SMT-JUMPER_3_2-NC_TRACE_SILK]  180.85,45.47 90 top
JP55  [SMT-JUMPER_2_NC_TRACE_SILK]  199.26,44.83 180 bottom
JP56  [SMT-JUMPER_2_NC_TRACE_SILK]  209.42,46.1 0 bottom
JP57  JUMPER  [SMT-JUMPER_2_NC_TRACE_SILK]  189.74,75.82 0 top
JP58  [SMT-JUMPER_3_2-NC_TRACE_SILK]  180.85,71.37 90 top
JP59  [SMT-JUMPER_2_NC_TRACE_SILK]  199.26,70.74 180 bottom
JP60  [SMT-JUMPER_2_NC_TRACE_SILK]  209.42,72.01 0 bottom
JP61  JUMPER  [SMT-JUMPER_2_NC_TRACE_SILK]  189.74,101.73 0 top
JP62  [SMT-JUMPER_3_2-NC_TRACE_SILK]  180.85,97.28 90 top
JP63  [SMT-JUMPER_2_NC_TRACE_SILK]  199.26,96.65 180 bottom
JP64  [SMT-JUMPER_2_NC_TRACE_SILK]  209.42,97.92 0 bottom
LOGO1  OSHW-LOGOM  [OSHW-LOGO-M]  25.91,14.22 0 bottom
LOGO2  OSHW-LOGOM  [OSHW-LOGO-M]  25.91,40.13 0 bottom
LOGO3  SFE_LOGO_NAME.1_INCH  [SFE_LOGO_NAME_.1]  39.24,27.81 0 top
LOGO4  SFE_LOGO_NAME_FLAME.1_INCH  [SFE_LOGO_NAME_FLAME_.1]  25.27,33.53 0 bottom
LOGO5  SFE_LOGO_NAME_FLAME.1_INCH  [SFE_LOGO_NAME_FLAME_.1]  25.27,7.62 0 bottom
LOGO6  SFE_LOGO_NAME.1_INCH  [SFE_LOGO_NAME_.1]  39.24,53.72 0 top
LOGO7  OSHW-LOGOM  [OSHW-LOGO-M]  25.91,66.04 0 bottom
LOGO8  SFE_LOGO_NAME_FLAME.1_INCH  [SFE_LOGO_NAME_FLAME_.1]  25.27,59.44 0 bottom
LOGO9  SFE_LOGO_NAME.1_INCH  [SFE_LOGO_NAME_.1]  39.24,79.63 0 top
LOGO10  OSHW-LOGOM  [OSHW-LOGO-M]  25.91,91.95 0 bottom
LOGO11  SFE_LOGO_NAME_FLAME.1_INCH  [SFE_LOGO_NAME_FLAME_.1]  25.27,85.34 0 bottom
LOGO12  SFE_LOGO_NAME.1_INCH  [SFE_LOGO_NAME_.1]  39.24,105.54 0 top
LOGO13  OSHW-LOGOM  [OSHW-LOGO-M]  80.52,14.22 0 bottom
LOGO14  SFE_LOGO_NAME_FLAME.1_INCH  [SFE_LOGO_NAME_FLAME_.1]  79.88,7.62 0 bottom
LOGO15  SFE_LOGO_NAME.1_INCH  [SFE_LOGO_NAME_.1]  93.85,27.81 0 top
LOGO16  OSHW-LOGOM  [OSHW-LOGO-M]  80.52,40.13 0 bottom
LOGO17  SFE_LOGO_NAME_FLAME.1_INCH  [SFE_LOGO_NAME_FLAME_.1]  79.88,33.53 0 bottom
LOGO18  SFE_LOGO_NAME.1_INCH  [SFE_LOGO_NAME_.1]  93.85,53.72 0 top
LOGO19  OSHW-LOGOM  [OSHW-LOGO-M]  80.52,66.04 0 bottom
LOGO20  SFE_LOGO_NAME_FLAME.1_INCH  [SFE_LOGO_NAME_FLAME_.1]  79.88,59.44 0 bottom
LOGO21  SFE_LOGO_NAME.1_INCH  [SFE_LOGO_NAME_.1]  93.85,79.63 0 top
LOGO22  OSHW-LOGOM  [OSHW-LOGO-M]  80.52,91.95 0 bottom
LOGO23  SFE_LOGO_NAME_FLAME.1_INCH  [SFE_LOGO_NAME_FLAME_.1]  79.88,85.34 0 bottom
LOGO24  SFE_LOGO_NAME.1_INCH  [SFE_LOGO_NAME_.1]  93.85,105.54 0 top
LOGO25  OSHW-LOGOM  [OSHW-LOGO-M]  135.13,14.22 0 bottom
LOGO26  SFE_LOGO_NAME_FLAME.1_INCH  [SFE_LOGO_NAME_FLAME_.1]  134.49,7.62 0 bottom
LOGO27  SFE_LOGO_NAME.1_INCH  [SFE_LOGO_NAME_.1]  148.46,27.81 0 top
LOGO28  OSHW-LOGOM  [OSHW-LOGO-M]  135.13,40.13 0 bottom
LOGO29  SFE_LOGO_NAME_FLAME.1_INCH  [SFE_LOGO_NAME_FLAME_.1]  134.49,33.53 0 bottom
LOGO30  SFE_LOGO_NAME.1_INCH  [SFE_LOGO_NAME_.1]  148.46,53.72 0 top
LOGO31  OSHW-LOGOM  [OSHW-LOGO-M]  135.13,66.04 0 bottom
LOGO32  SFE_LOGO_NAME_FLAME.1_INCH  [SFE_LOGO_NAME_FLAME_.1]  134.49,59.44 0 bottom
LOGO33  SFE_LOGO_NAME.1_INCH  [SFE_LOGO_NAME_.1]  148.46,79.63 0 top
LOGO34  OSHW-LOGOM  [OSHW-LOGO-M]  135.13,91.95 0 bottom
LOGO35  SFE_LOGO_NAME_FLAME.1_INCH  [SFE_LOGO_NAME_FLAME_.1]  134.49,85.34 0 bottom
LOGO36  SFE_LOGO_NAME.1_INCH  [SFE_LOGO_NAME_.1]  148.46,105.54 0 top
LOGO37  OSHW-LOGOM  [OSHW-LOGO-M]  189.74,14.22 0 bottom
LOGO38  SFE_LOGO_NAME_FLAME.1_INCH  [SFE_LOGO_NAME_FLAME_.1]  189.1,7.62 0 bottom
LOGO39  SFE_LOGO_NAME.1_INCH  [SFE_LOGO_NAME_.1]  203.07,27.81 0 top
LOGO40  OSHW-LOGOM  [OSHW-LOGO-M]  189.74,40.13 0 bottom
LOGO41  SFE_LOGO_NAME_FLAME.1_INCH  [SFE_LOGO_NAME_FLAME_.1]  189.1,33.53 0 bottom
LOGO42  SFE_LOGO_NAME.1_INCH  [SFE_LOGO_NAME_.1]  203.07,53.72 0 top
LOGO43  OSHW-LOGOM  [OSHW-LOGO-M]  189.74,66.04 0 bottom
LOGO44  SFE_LOGO_NAME_FLAME.1_INCH  [SFE_LOGO_NAME_FLAME_.1]  189.1,59.44 0 bottom
LOGO45  SFE_LOGO_NAME.1_INCH  [SFE_LOGO_NAME_.1]  203.07,79.63 0 top
LOGO46  OSHW-LOGOM  [OSHW-LOGO-M]  189.74,91.95 0 bottom
LOGO47  SFE_LOGO_NAME_FLAME.1_INCH  [SFE_LOGO_NAME_FLAME_.1]  189.1,85.34 0 bottom
LOGO48  SFE_LOGO_NAME.1_INCH  [SFE_LOGO_NAME_.1]  203.07,105.54 0 top
R1  390  [0603]  33.8,17.65 180 top
R2  100  [0603]  36.34,16.38 90 top
R3  390  [0603]  33.8,15.11 0 top
R4  390  [0603]  33.8,21.46 180 top
R5  100  [0603]  36.34,22.73 270 top
R6  390  [0603]  33.8,24 0 top
R7  4.7k  [0603]  17.02,17.02 0 top
R8  4.7k  [0603]  17.02,22.1 0 top
R9  390  [0603]  33.8,43.56 180 top
R10  100  [0603]  36.34,42.29 90 top
R11  390  [0603]  33.8,41.02 0 top
R12  390  [0603]  33.8,47.37 180 top
R13  100  [0603]  36.34,48.64 270 top
R14  390  [0603]  33.8,49.91 0 top
R15  4.7k  [0603]  17.02,42.93 0 top
R16  4.7k  [0603]  17.02,48.01 0 top
R17  390  [0603]  33.8,69.47 180 top
R18  100  [0603]  36.34,68.2 90 top
R19  390  [0603]  33.8,66.93 0 top
R20  390  [0603]  33.8,73.28 180 top
R21  100  [0603]  36.34,74.55 270 top
R22  390  [0603]  33.8,75.82 0 top
R23  4.7k  [0603]  17.02,68.83 0 top
R24  4.7k  [0603]  17.02,73.91 0 top
R25  390  [0603]  33.8,95.38 180 top
R26  100  [0603]  36.34,94.11 90 top
R27  390  [0603]  33.8,92.84 0 top
R28  390  [0603]  33.8,99.19 180 top
R29  100  [0603]  36.34,100.46 270 top
R30  390  [0603]  33.8,101.73 0 top
R31  4.7k  [0603]  17.02,94.74 0 top
R32  4.7k  [0603]  17.02,99.82 0 top
R33  390  [0603]  88.41,17.65 180 top
R34  100  [0603]  90.95,16.38 90 top
R35  390  [0603]  88.41,15.11 0 top
R36  390  [0603]  88.41,21.46 180 top
R37  100  [0603]  90.95,22.73 270 top
R38  390  [0603]  88.41,24 0 top
R39  4.7k  [0603]  71.63,17.02 0 top
R40  4.7k  [0603]  71.63,22.1 0 top
R41  390  [0603]  88.41,43.56 180 top
R42  100  [0603]  90.95,42.29 90 top
R43  390  [0603]  88.41,41.02 0 top
R44  390  [0603]  88.41,47.37 180 top
R45  100  [0603]  90.95,48.64 270 top
R46  390  [0603]  88.41,49.91 0 top
R47  4.7k  [0603]  71.63,42.93 0 top
R48  4.7k  [0603]  71.63,48.01 0 top
R49  390  [0603]  88.41,69.47 180 top
R50  100  [0603]  90.95,68.2 90 top
R51  390  [0603]  88.41,66.93 0 top
R52  390  [0603]  88.41,73.28 180 top
R53  100  [0603]  90.95,74.55 270 top
R54  390  [0603]  88.41,75.82 0 top
R55  4.7k  [0603]  71.63,68.83 0 top
R56  4.7k  [0603]  71.63,73.91 0 top
R57  390  [0603]  88.41,95.38 180 top
R58  100  [0603]  90.95,94.11 90 top
R59  390  [0603]  88.41,92.84 0 top
R60  390  [0603]  88.41,99.19 180 top
R61  100  [0603]  90.95,100.46 270 top
R62  390  [0603]  88.41,101.73 0 top
R63  4.7k  [0603]  71.63,94.74 0 top
R64  4.7k  [0603]  71.63,99.82 0 top
R65  390  [0603]  143.02,17.65 180 top
R66  100  [0603]  145.56,16.38 90 top
R67  390  [0603]  143.02,15.11 0 top
R68  390  [0603]  143.02,21.46 180 top
R69  100  [0603]  145.56,22.73 270 top
R70  390  [0603]  143.02,24 0 top
R71  4.7k  [0603]  126.24,17.02 0 top
R72  4.7k  [0603]  126.24,22.1 0 top
R73  390  [0603]  143.02,43.56 180 top
R74  100  [0603]  145.56,42.29 90 top
R75  390  [0603]  143.02,41.02 0 top
R76  390  [0603]  143.02,47.37 180 top
R77  100  [0603]  145.56,48.64 270 top
R78  390  [0603]  143.02,49.91 0 top
R79  4.7k  [0603]  126.24,42.93 0 top
R80  4.7k  [0603]  126.24,48.01 0 top
R81  390  [0603]  143.02,69.47 180 top
R82  100  [0603]  145.56,68.2 90 top
R83  390  [0603]  143.02,66.93 0 top
R84  390  [0603]  143.02,73.28 180 top
R85  100  [0603]  145.56,74.55 270 top
R86  390  [0603]  143.02,75.82 0 top
R87  4.7k  [0603]  126.24,68.83 0 top
R88  4.7k  [0603]  126.24,73.91 0 top
R89  390  [0603]  143.02,95.38 180 top
R90  100  [0603]  145.56,94.11 90 top
R91  390  [0603]  143.02,92.84 0 top
R92  390  [0603]  143.02,99.19 180 top
R93  100  [0603]  145.56,100.46 270 top
R94  390  [0603]  143.02,101.73 0 top
R95  4.7k  [0603]  126.24,94.74 0 top
R96  4.7k  [0603]  126.24,99.82 0 top
R97  390  [0603]  197.63,17.65 180 top
R98  100  [0603]  200.17,16.38 90 top
R99  390  [0603]  197.63,15.11 0 top
R100  390  [0603]  197.63,21.46 180 top
R101  100  [0603]  200.17,22.73 270 top
R102  390  [0603]  197.63,24 0 top
R103  4.7k  [0603]  180.85,17.02 0 top
R104  4.7k  [0603]  180.85,22.1 0 top
R105  390  [0603]  197.63,43.56 180 top
R106  100  [0603]  200.17,42.29 90 top
R107  390  [0603]  197.63,41.02 0 top
R108  390  [0603]  197.63,47.37 180 top
R109  100  [0603]  200.17,48.64 270 top
R110  390  [0603]  197.63,49.91 0 top
R111  4.7k  [0603]  180.85,42.93 0 top
R112  4.7k  [0603]  180.85,48.01 0 top
R113  390  [0603]  197.63,69.47 180 top
R114  100  [0603]  200.17,68.2 90 top
R115  390  [0603]  197.63,66.93 0 top
R116  390  [0603]  197.63,73.28 180 top
R117  100  [0603]  200.17,74.55 270 top
R118  390  [0603]  197.63,75.82 0 top
R119  4.7k  [0603]  180.85,68.83 0 top
R120  4.7k  [0603]  180.85,73.91 0 top
R121  390  [0603]  197.63,95.38 180 top
R122  100  [0603]  200.17,94.11 90 top
R123  390  [0603]  197.63,92.84 0 top
R124  390  [0603]  197.63,99.19 180 top
R125  100  [0603]  200.17,100.46 270 top
R126  390  [0603]  197.63,101.73 0 top
R127  4.7k  [0603]  180.85,94.74 0 top
R128  4.7k  [0603]  180.85,99.82 0 top
U1  PCA9615  [TSSOP10]  25.91,19.56 0 top
U2  PCA9615  [TSSOP10]  25.91,45.47 0 top
U3  PCA9615  [TSSOP10]  25.91,71.37 0 top
U4  PCA9615  [TSSOP10]  25.91,97.28 0 top
U5  PCA9615  [TSSOP10]  80.52,19.56 0 top
U6  PCA9615  [TSSOP10]  80.52,45.47 0 top
U7  PCA9615  [TSSOP10]  80.52,71.37 0 top
U8  PCA9615  [TSSOP10]  80.52,97.28 0 top
U9  PCA9615  [TSSOP10]  135.13,19.56 0 top
U10  PCA9615  [TSSOP10]  135.13,45.47 0 top
U11  PCA9615  [TSSOP10]  135.13,71.37 0 top
U12  PCA9615  [TSSOP10]  135.13,97.28 0 top
U13  PCA9615  [TSSOP10]  189.74,19.56 0 top
U14  PCA9615  [TSSOP10]  189.74,45.47 0 top
U15  PCA9615  [TSSOP10]  189.74,71.37 0 top
U16  PCA9615  [TSSOP10]  189.74,97.28 0 top

## Library data of the parts
C1 C2 C5 C6 C9 C10 C13 C14 C17 C18 C21 C22 C25 C26 C29 C30 C33 C34 C37 C38 C41 C42 C45 C46 C49 C50 C53 C54 C57 C58 C61 C62 = SparkFun-Capacitors; PROD_ID: CAP-00810
C3 C4 C7 C8 C11 C12 C15 C16 C19 C20 C23 C24 C27 C28 C31 C32 C35 C36 C39 C40 C43 C44 C47 C48 C51 C52 C55 C56 C59 C60 C63 C64 = SparkFun-Capacitors; PROD_ID: CAP-00868
E$1 E$2 FD1-FD64 LOGO1-LOGO48 = SparkFun-Aesthetics
E$3 = SparkFun-Retired
H1-H64 = SparkFun-Hardware
J1 J2 J7 J8 J13 J14 J19 J20 J25 J26 J31 J32 J37 J38 J43 J44 J49 J50 J55 J56 J61 J62 J67 J68 J73 J74 J79 J80 J85 J86 J91 J92 = SparkFun-Connectors; PROD_ID: CONN-13694
J3 J9 J15 J21 J27 J33 J39 J45 J51 J57 J63 J69 J75 J81 J87 J93 = SparkFun-Connectors; PROD_ID: CONN-08506; SF_ID: PRT-00643
J4 J5 J11 J12 J17 J18 J23 J24 J29 J30 J35 J36 J41 J42 J47 J48 J53 J54 J59 J60 J65 J66 J71 J72 J77 J78 J83 J84 J89 J90 J95 J96 = SparkFun-Connectors
J6 J10 J16 J22 J28 J34 J40 J46 J52 J58 J64 J70 J76 J82 J88 J94 = SparkX
JP1-JP64 = SparkFun-Jumpers
R1 R3 R4 R6 R9 R11 R12 R14 R17 R19 R20 R22 R25 R27 R28 R30 R33 R35 R36 R38 R41 R43 R44 R46 R49 R51 R52 R54 R57 R59 R60 R62 R65 R67 R68 R70 R73 R75 R76 R78 R81 R83 R84 R86 R89 R91 R92 R94 R97 R99 R100 R102 R105 R107 R108 R110 R113 R115 R116 R118 R121 R123 R124 R126 = SparkFun-Resistors; PROD_ID: RES-07864
R2 R5 R10 R13 R18 R21 R26 R29 R34 R37 R42 R45 R50 R53 R58 R61 R66 R69 R74 R77 R82 R85 R90 R93 R98 R101 R106 R109 R114 R117 R122 R125 = SparkFun-Resistors; PROD_ID: RES-07863
R7 R8 R15 R16 R23 R24 R31 R32 R39 R40 R47 R48 R55 R56 R63 R64 R71 R72 R79 R80 R87 R88 R95 R96 R103 R104 R111 R112 R119 R120 R127 R128 = SparkFun-Resistors; PROD_ID: RES-07857
U1-U16 = SparkFun-IC-Comms; PROD_ID: IC-13899

## Nets
DSCL+: J3.2 R1.1 R2.2 U1.7
DSCL+1: J9.2 R9.1 R10.2 U2.7
DSCL+2: J15.2 R17.1 R18.2 U3.7
DSCL+3: J21.2 R25.1 R26.2 U4.7
DSCL+4: J27.2 R33.1 R34.2 U5.7
DSCL+5: J33.2 R41.1 R42.2 U6.7
DSCL+6: J39.2 R49.1 R50.2 U7.7
DSCL+7: J45.2 R57.1 R58.2 U8.7
DSCL+8: J51.2 R65.1 R66.2 U9.7
DSCL+9: J57.2 R73.1 R74.2 U10.7
DSCL+10: J63.2 R81.1 R82.2 U11.7
DSCL+11: J69.2 R89.1 R90.2 U12.7
DSCL+12: J75.2 R97.1 R98.2 U13.7
DSCL+13: J81.2 R105.1 R106.2 U14.7
DSCL+14: J87.2 R113.1 R114.2 U15.7
DSCL+15: J93.2 R121.1 R122.2 U16.7
DSCL-: J3.1 R2.1 R3.2 U1.6
DSCL-1: J9.1 R10.1 R11.2 U2.6
DSCL-2: J15.1 R18.1 R19.2 U3.6
DSCL-3: J21.1 R26.1 R27.2 U4.6
DSCL-4: J27.1 R34.1 R35.2 U5.6
DSCL-5: J33.1 R42.1 R43.2 U6.6
DSCL-6: J39.1 R50.1 R51.2 U7.6
DSCL-7: J45.1 R58.1 R59.2 U8.6
DSCL-8: J51.1 R66.1 R67.2 U9.6
DSCL-9: J57.1 R74.1 R75.2 U10.6
DSCL-10: J63.1 R82.1 R83.2 U11.6
DSCL-11: J69.1 R90.1 R91.2 U12.6
DSCL-12: J75.1 R98.1 R99.2 U13.6
DSCL-13: J81.1 R106.1 R107.2 U14.6
DSCL-14: J87.1 R114.1 R115.2 U15.6
DSCL-15: J93.1 R122.1 R123.2 U16.6
DSDA+: J3.8 R4.1 R5.2 U1.8
DSDA+1: J9.8 R12.1 R13.2 U2.8
DSDA+2: J15.8 R20.1 R21.2 U3.8
DSDA+3: J21.8 R28.1 R29.2 U4.8
DSDA+4: J27.8 R36.1 R37.2 U5.8
DSDA+5: J33.8 R44.1 R45.2 U6.8
DSDA+6: J39.8 R52.1 R53.2 U7.8
DSDA+7: J45.8 R60.1 R61.2 U8.8
DSDA+8: J51.8 R68.1 R69.2 U9.8
DSDA+9: J57.8 R76.1 R77.2 U10.8
DSDA+10: J63.8 R84.1 R85.2 U11.8
DSDA+11: J69.8 R92.1 R93.2 U12.8
DSDA+12: J75.8 R100.1 R101.2 U13.8
DSDA+13: J81.8 R108.1 R109.2 U14.8
DSDA+14: J87.8 R116.1 R117.2 U15.8
DSDA+15: J93.8 R124.1 R125.2 U16.8
DSDA-: J3.7 R5.1 R6.2 U1.9
DSDA-1: J9.7 R13.1 R14.2 U2.9
DSDA-2: J15.7 R21.1 R22.2 U3.9
DSDA-3: J21.7 R29.1 R30.2 U4.9
DSDA-4: J27.7 R37.1 R38.2 U5.9
DSDA-5: J33.7 R45.1 R46.2 U6.9
DSDA-6: J39.7 R53.1 R54.2 U7.9
DSDA-7: J45.7 R61.1 R62.2 U8.9
DSDA-8: J51.7 R69.1 R70.2 U9.9
DSDA-9: J57.7 R77.1 R78.2 U10.9
DSDA-10: J63.7 R85.1 R86.2 U11.9
DSDA-11: J69.7 R93.1 R94.2 U12.9
DSDA-12: J75.7 R101.1 R102.2 U13.9
DSDA-13: J81.7 R109.1 R110.2 U14.9
DSDA-14: J87.7 R117.1 R118.2 U15.9
DSDA-15: J93.7 R125.1 R126.2 U16.9
EN: J5.1 U1.3
EN1: J12.1 U2.3
EN2: J18.1 U3.3
EN3: J24.1 U4.3
EN4: J30.1 U5.3
EN5: J36.1 U6.3
EN6: J42.1 U7.3
EN7: J48.1 U8.3
EN8: J54.1 U9.3
EN9: J60.1 U10.3
EN10: J66.1 U11.3
EN11: J72.1 U12.3
EN12: J78.1 U13.3
EN13: J84.1 U14.3
EN14: J90.1 U15.3
EN15: J96.1 U16.3
GND: C1.2 C2.2 C3.2 C4.2 J1.1 J2.1 J4.1 J6.1 JP4.1 R3.1 R6.1 U1.5
GND1: C5.2 C6.2 C7.2 C8.2 J7.1 J8.1 J10.1 J11.1 JP8.1 R11.1 R14.1 U2.5
GND2: C9.2 C10.2 C11.2 C12.2 J13.1 J14.1 J16.1 J17.1 JP12.1 R19.1 R22.1 U3.5
GND3: C13.2 C14.2 C15.2 C16.2 J19.1 J20.1 J22.1 J23.1 JP16.1 R27.1 R30.1 U4.5
GND4: C17.2 C18.2 C19.2 C20.2 J25.1 J26.1 J28.1 J29.1 JP20.1 R35.1 R38.1 U5.5
GND5: C21.2 C22.2 C23.2 C24.2 J31.1 J32.1 J34.1 J35.1 JP24.1 R43.1 R46.1 U6.5
GND6: C25.2 C26.2 C27.2 C28.2 J37.1 J38.1 J40.1 J41.1 JP28.1 R51.1 R54.1 U7.5
GND7: C29.2 C30.2 C31.2 C32.2 J43.1 J44.1 J46.1 J47.1 JP32.1 R59.1 R62.1 U8.5
GND8: C33.2 C34.2 C35.2 C36.2 J49.1 J50.1 J52.1 J53.1 JP36.1 R67.1 R70.1 U9.5
GND9: C37.2 C38.2 C39.2 C40.2 J55.1 J56.1 J58.1 J59.1 JP40.1 R75.1 R78.1 U10.5
GND10: C41.2 C42.2 C43.2 C44.2 J61.1 J62.1 J64.1 J65.1 JP44.1 R83.1 R86.1 U11.5
GND11: C45.2 C46.2 C47.2 C48.2 J67.1 J68.1 J70.1 J71.1 JP48.1 R91.1 R94.1 U12.5
GND12: C49.2 C50.2 C51.2 C52.2 J73.1 J74.1 J76.1 J77.1 JP52.1 R99.1 R102.1 U13.5
GND13: C53.2 C54.2 C55.2 C56.2 J79.1 J80.1 J82.1 J83.1 JP56.1 R107.1 R110.1 U14.5
GND14: C57.2 C58.2 C59.2 C60.2 J85.1 J86.1 J88.1 J89.1 JP60.1 R115.1 R118.1 U15.5
GND15: C61.2 C62.2 C63.2 C64.2 J91.1 J92.1 J94.1 J95.1 JP64.1 R123.1 R126.1 U16.5
N$1: J3.4 JP3.2
N$2: J3.5 JP4.2
N$3: JP2.1 R8.2
N$4: JP2.3 R7.2
N$5: JP6.1 R16.2
N$6: JP6.3 R15.2
N$7: J9.4 JP7.2
N$8: J9.5 JP8.2
N$9: JP10.1 R24.2
N$10: JP10.3 R23.2
N$11: J15.4 JP11.2
N$12: J15.5 JP12.2
N$13: JP14.1 R32.2
N$14: JP14.3 R31.2
N$15: J21.4 JP15.2
N$16: J21.5 JP16.2
N$17: JP18.1 R40.2
N$18: JP18.3 R39.2
N$19: J27.4 JP19.2
N$20: J27.5 JP20.2
N$21: JP22.1 R48.2
N$22: JP22.3 R47.2
N$23: J33.4 JP23.2
N$24: J33.5 JP24.2
N$25: JP26.1 R56.2
N$26: JP26.3 R55.2
N$27: J39.4 JP27.2
N$28: J39.5 JP28.2
N$29: JP30.1 R64.2
N$30: JP30.3 R63.2
N$31: J45.4 JP31.2
N$32: J45.5 JP32.2
N$33: JP34.1 R72.2
N$34: JP34.3 R71.2
N$35: J51.4 JP35.2
N$36: J51.5 JP36.2
N$37: JP38.1 R80.2
N$38: JP38.3 R79.2
N$39: J57.4 JP39.2
N$40: J57.5 JP40.2
N$41: JP42.1 R88.2
N$42: JP42.3 R87.2
N$43: J63.4 JP43.2
N$44: J63.5 JP44.2
N$45: JP46.1 R96.2
N$46: JP46.3 R95.2
N$47: J69.4 JP47.2
N$48: J69.5 JP48.2
N$49: JP50.1 R104.2
N$50: JP50.3 R103.2
N$51: J75.4 JP51.2
N$52: J75.5 JP52.2
N$53: JP54.1 R112.2
N$54: JP54.3 R111.2
N$55: J81.4 JP55.2
N$56: J81.5 JP56.2
N$57: JP58.1 R120.2
N$58: JP58.3 R119.2
N$59: J87.4 JP59.2
N$60: J87.5 JP60.2
N$61: JP62.1 R128.2
N$62: JP62.3 R127.2
N$63: J93.4 JP63.2
N$64: J93.5 JP64.2
SCL: J1.4 J2.4 J6.4 R7.1 U1.4
SCL1: J7.4 J8.4 J10.4 R15.1 U2.4
SCL2: J13.4 J14.4 J16.4 R23.1 U3.4
SCL3: J19.4 J20.4 J22.4 R31.1 U4.4
SCL4: J25.4 J26.4 J28.4 R39.1 U5.4
SCL5: J31.4 J32.4 J34.4 R47.1 U6.4
SCL6: J37.4 J38.4 J40.4 R55.1 U7.4
SCL7: J43.4 J44.4 J46.4 R63.1 U8.4
SCL8: J49.4 J50.4 J52.4 R71.1 U9.4
SCL9: J55.4 J56.4 J58.4 R79.1 U10.4
SCL10: J61.4 J62.4 J64.4 R87.1 U11.4
SCL11: J67.4 J68.4 J70.4 R95.1 U12.4
SCL12: J73.4 J74.4 J76.4 R103.1 U13.4
SCL13: J79.4 J80.4 J82.4 R111.1 U14.4
SCL14: J85.4 J86.4 J88.4 R119.1 U15.4
SCL15: J91.4 J92.4 J94.4 R127.1 U16.4
SDA: J1.3 J2.3 J6.3 R8.1 U1.2
SDA1: J7.3 J8.3 J10.3 R16.1 U2.2
SDA2: J13.3 J14.3 J16.3 R24.1 U3.2
SDA3: J19.3 J20.3 J22.3 R32.1 U4.2
SDA4: J25.3 J26.3 J28.3 R40.1 U5.2
SDA5: J31.3 J32.3 J34.3 R48.1 U6.2
SDA6: J37.3 J38.3 J40.3 R56.1 U7.2
SDA7: J43.3 J44.3 J46.3 R64.1 U8.2
SDA8: J49.3 J50.3 J52.3 R72.1 U9.2
SDA9: J55.3 J56.3 J58.3 R80.1 U10.2
SDA10: J61.3 J62.3 J64.3 R88.1 U11.2
SDA11: J67.3 J68.3 J70.3 R96.1 U12.2
SDA12: J73.3 J74.3 J76.3 R104.1 U13.2
SDA13: J79.3 J80.3 J82.3 R112.1 U14.2
SDA14: J85.3 J86.3 J88.3 R120.1 U15.2
SDA15: J91.3 J92.3 J94.3 R128.1 U16.2
VDD_A: C1.1 C3.1 J1.2 J2.2 J6.2 JP1.1 JP2.2 U1.1
VDD_A1: C5.1 C7.1 J7.2 J8.2 J10.2 JP5.1 JP6.2 U2.1
VDD_A2: C9.1 C11.1 J13.2 J14.2 J16.2 JP9.1 JP10.2 U3.1
VDD_A3: C13.1 C15.1 J19.2 J20.2 J22.2 JP13.1 JP14.2 U4.1
VDD_A4: C17.1 C19.1 J25.2 J26.2 J28.2 JP17.1 JP18.2 U5.1
VDD_A5: C21.1 C23.1 J31.2 J32.2 J34.2 JP21.1 JP22.2 U6.1
VDD_A6: C25.1 C27.1 J37.2 J38.2 J40.2 JP25.1 JP26.2 U7.1
VDD_A7: C29.1 C31.1 J43.2 J44.2 J46.2 JP29.1 JP30.2 U8.1
VDD_A8: C33.1 C35.1 J49.2 J50.2 J52.2 JP33.1 JP34.2 U9.1
VDD_A9: C37.1 C39.1 J55.2 J56.2 J58.2 JP37.1 JP38.2 U10.1
VDD_A10: C41.1 C43.1 J61.2 J62.2 J64.2 JP41.1 JP42.2 U11.1
VDD_A11: C45.1 C47.1 J67.2 J68.2 J70.2 JP45.1 JP46.2 U12.1
VDD_A12: C49.1 C51.1 J73.2 J74.2 J76.2 JP49.1 JP50.2 U13.1
VDD_A13: C53.1 C55.1 J79.2 J80.2 J82.2 JP53.1 JP54.2 U14.1
VDD_A14: C57.1 C59.1 J85.2 J86.2 J88.2 JP57.1 JP58.2 U15.1
VDD_A15: C61.1 C63.1 J91.2 J92.2 J94.2 JP61.1 JP62.2 U16.1
VDD_B: C2.1 C4.1 J4.2 JP1.2 JP3.1 R1.2 R4.2 U1.10
VDD_B1: C6.1 C8.1 J11.2 JP5.2 JP7.1 R9.2 R12.2 U2.10
VDD_B2: C10.1 C12.1 J17.2 JP9.2 JP11.1 R17.2 R20.2 U3.10
VDD_B3: C14.1 C16.1 J23.2 JP13.2 JP15.1 R25.2 R28.2 U4.10
VDD_B4: C18.1 C20.1 J29.2 JP17.2 JP19.1 R33.2 R36.2 U5.10
VDD_B5: C22.1 C24.1 J35.2 JP21.2 JP23.1 R41.2 R44.2 U6.10
VDD_B6: C26.1 C28.1 J41.2 JP25.2 JP27.1 R49.2 R52.2 U7.10
VDD_B7: C30.1 C32.1 J47.2 JP29.2 JP31.1 R57.2 R60.2 U8.10
VDD_B8: C34.1 C36.1 J53.2 JP33.2 JP35.1 R65.2 R68.2 U9.10
VDD_B9: C38.1 C40.1 J59.2 JP37.2 JP39.1 R73.2 R76.2 U10.10
VDD_B10: C42.1 C44.1 J65.2 JP41.2 JP43.1 R81.2 R84.2 U11.10
VDD_B11: C46.1 C48.1 J71.2 JP45.2 JP47.1 R89.2 R92.2 U12.10
VDD_B12: C50.1 C52.1 J77.2 JP49.2 JP51.1 R97.2 R100.2 U13.10
VDD_B13: C54.1 C56.1 J83.2 JP53.2 JP55.1 R105.2 R108.2 U14.10
VDD_B14: C58.1 C60.1 J89.2 JP57.2 JP59.1 R113.2 R116.2 U15.10
VDD_B15: C62.1 C64.1 J95.2 JP61.2 JP63.1 R121.2 R124.2 U16.10